# EAGLE board Teensylu-1.2-4L (EAGLE 7.1.0)
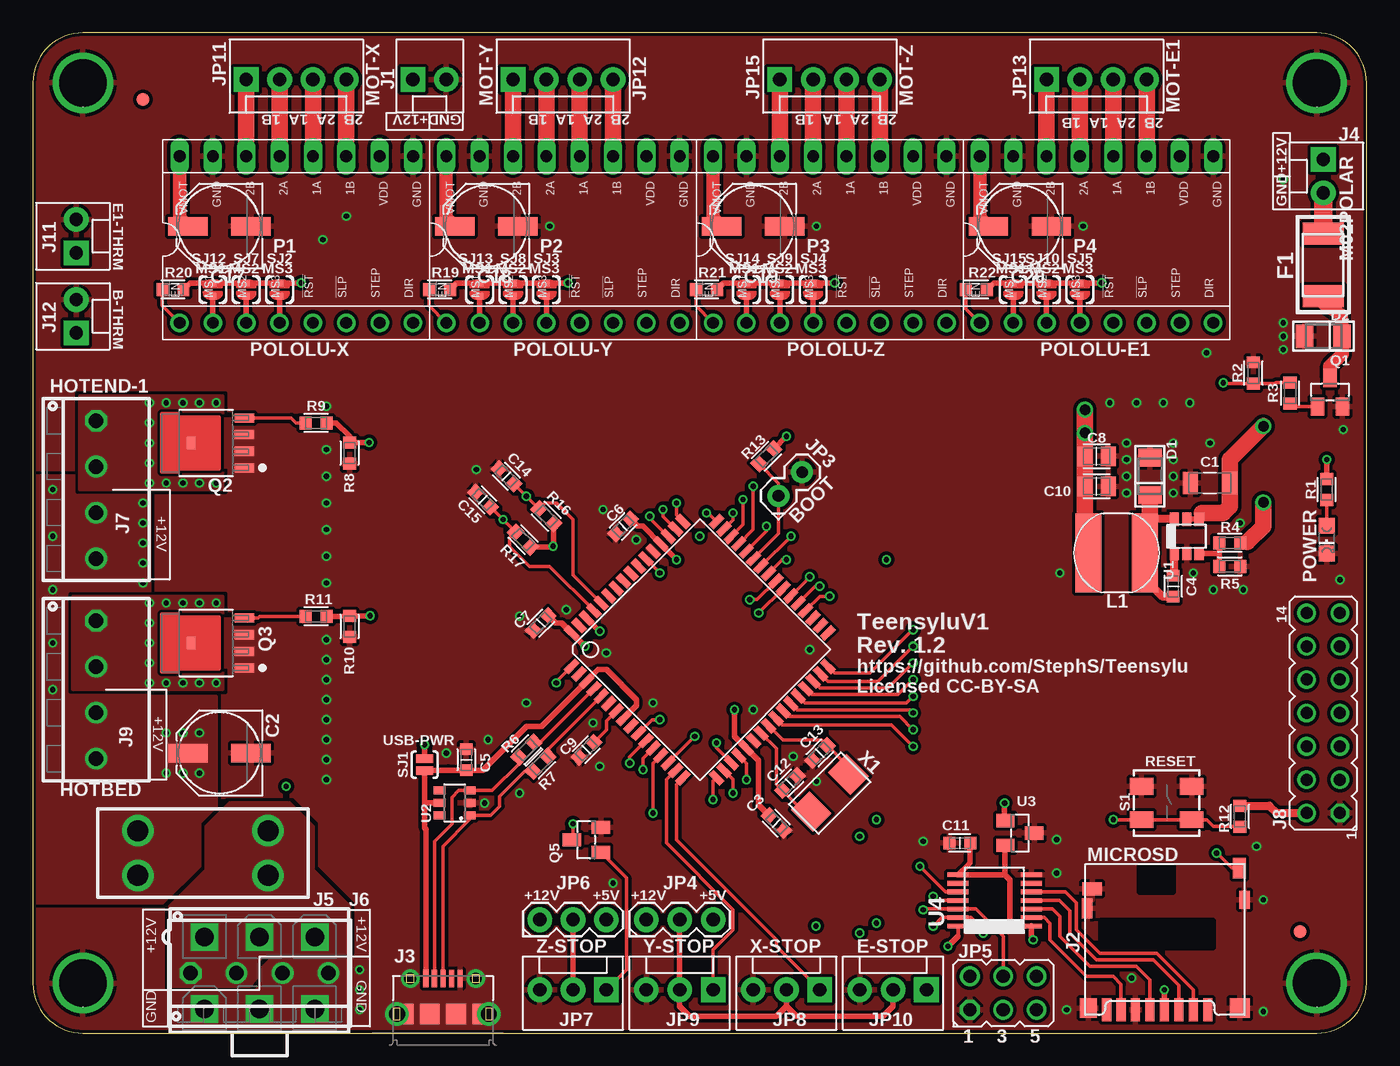
[diagram p0: board, top side]
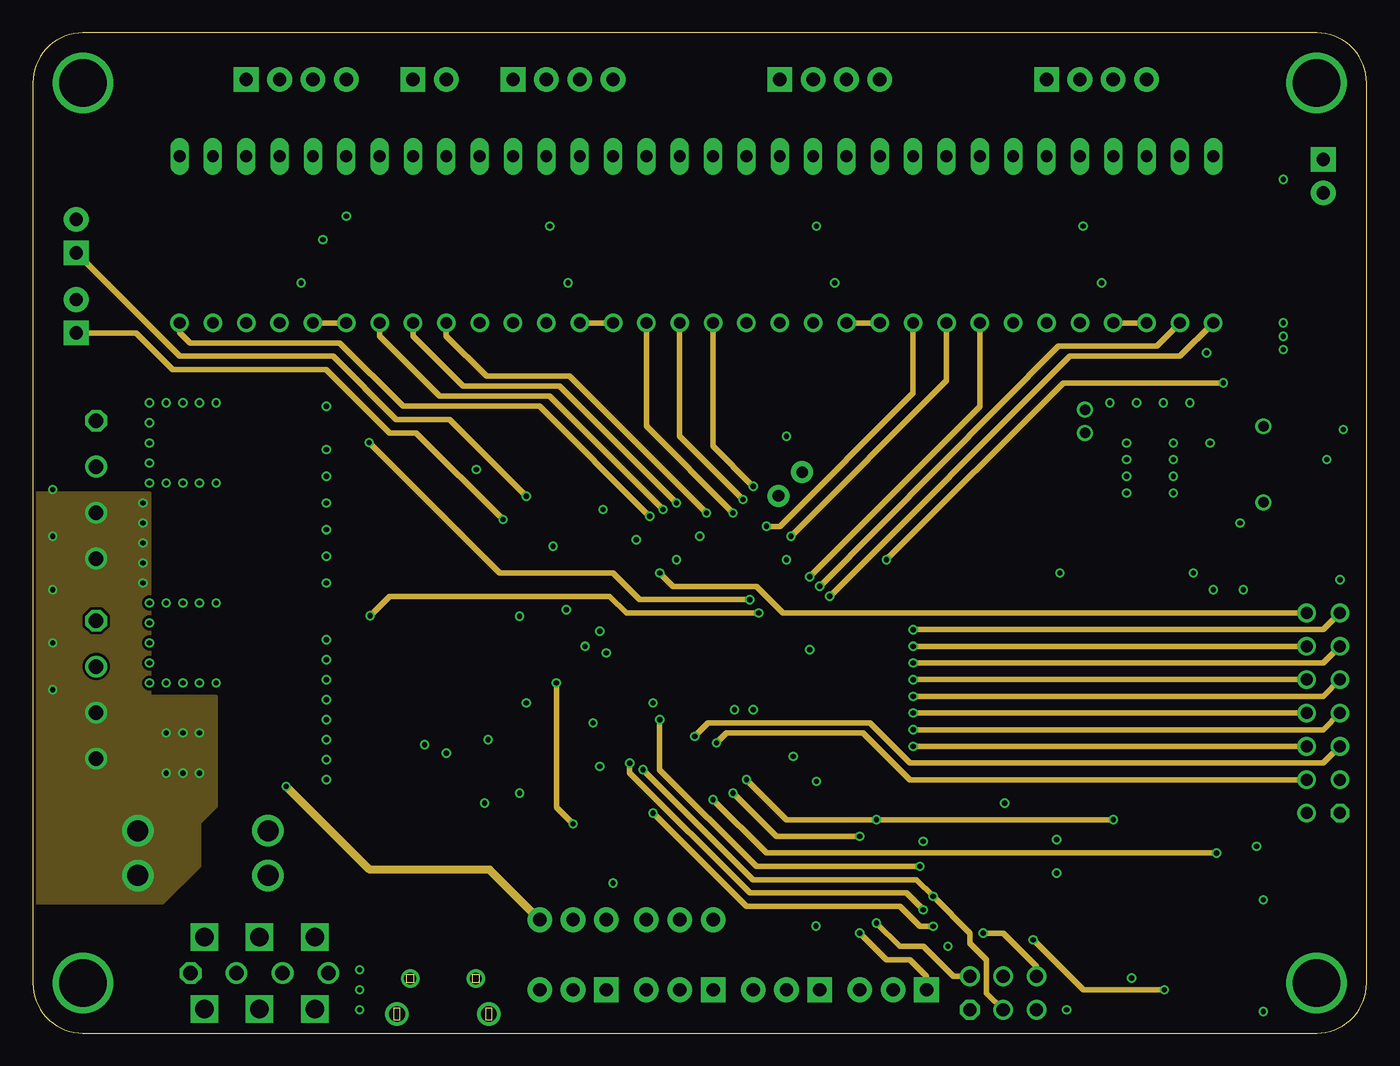
[diagram p1: board, inner layer Route2]
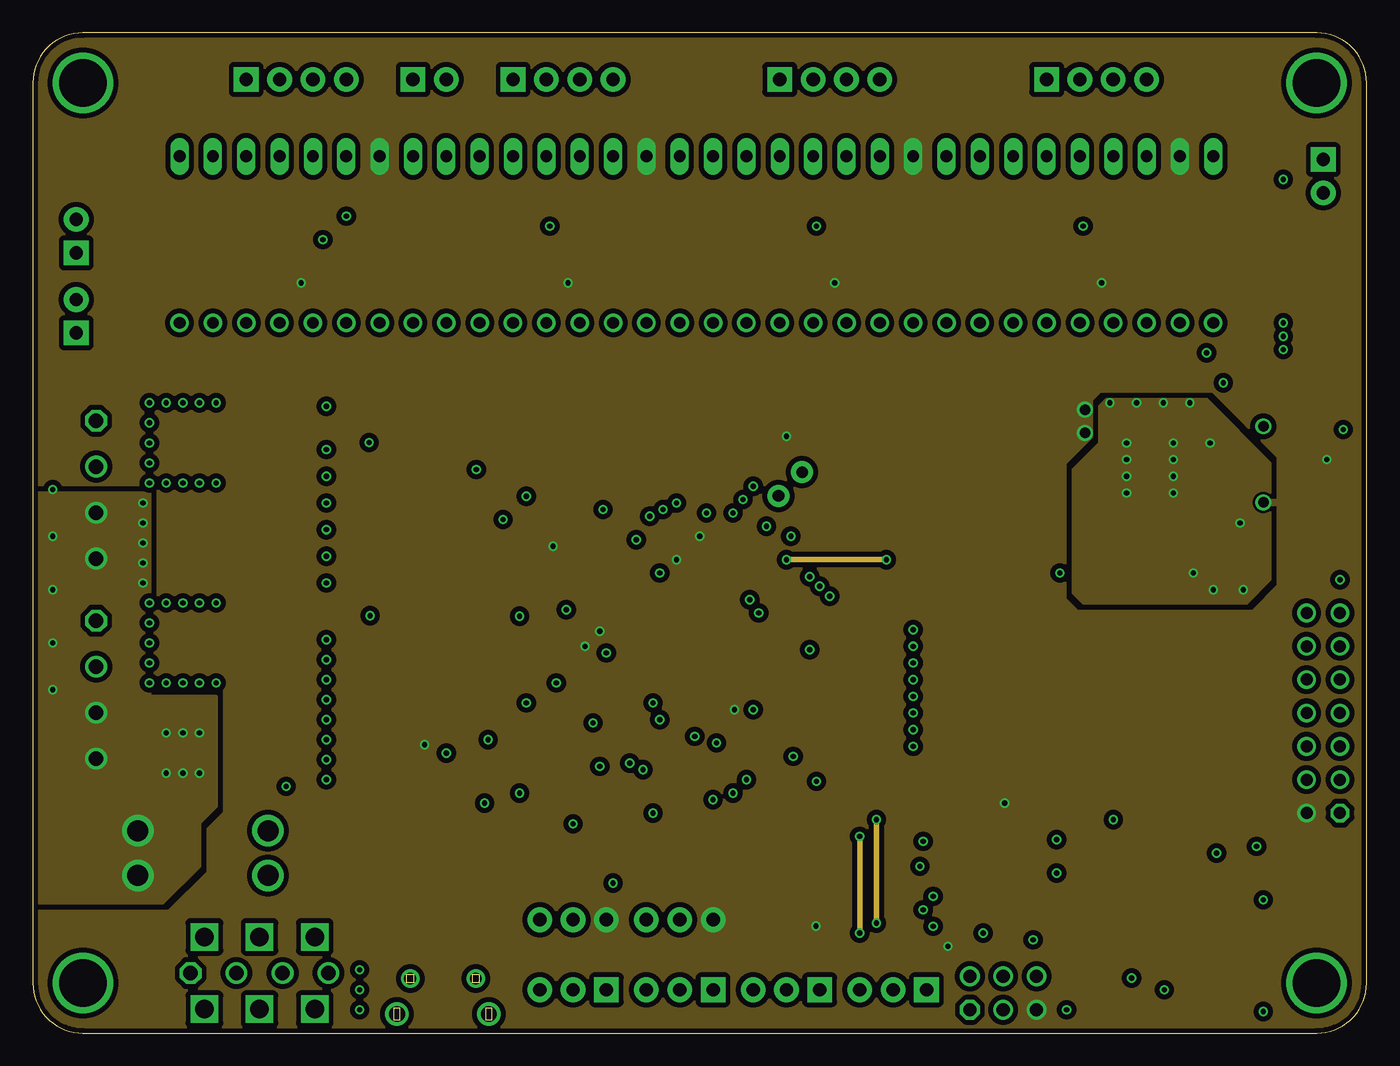
[diagram p2: board, inner layer Route15]
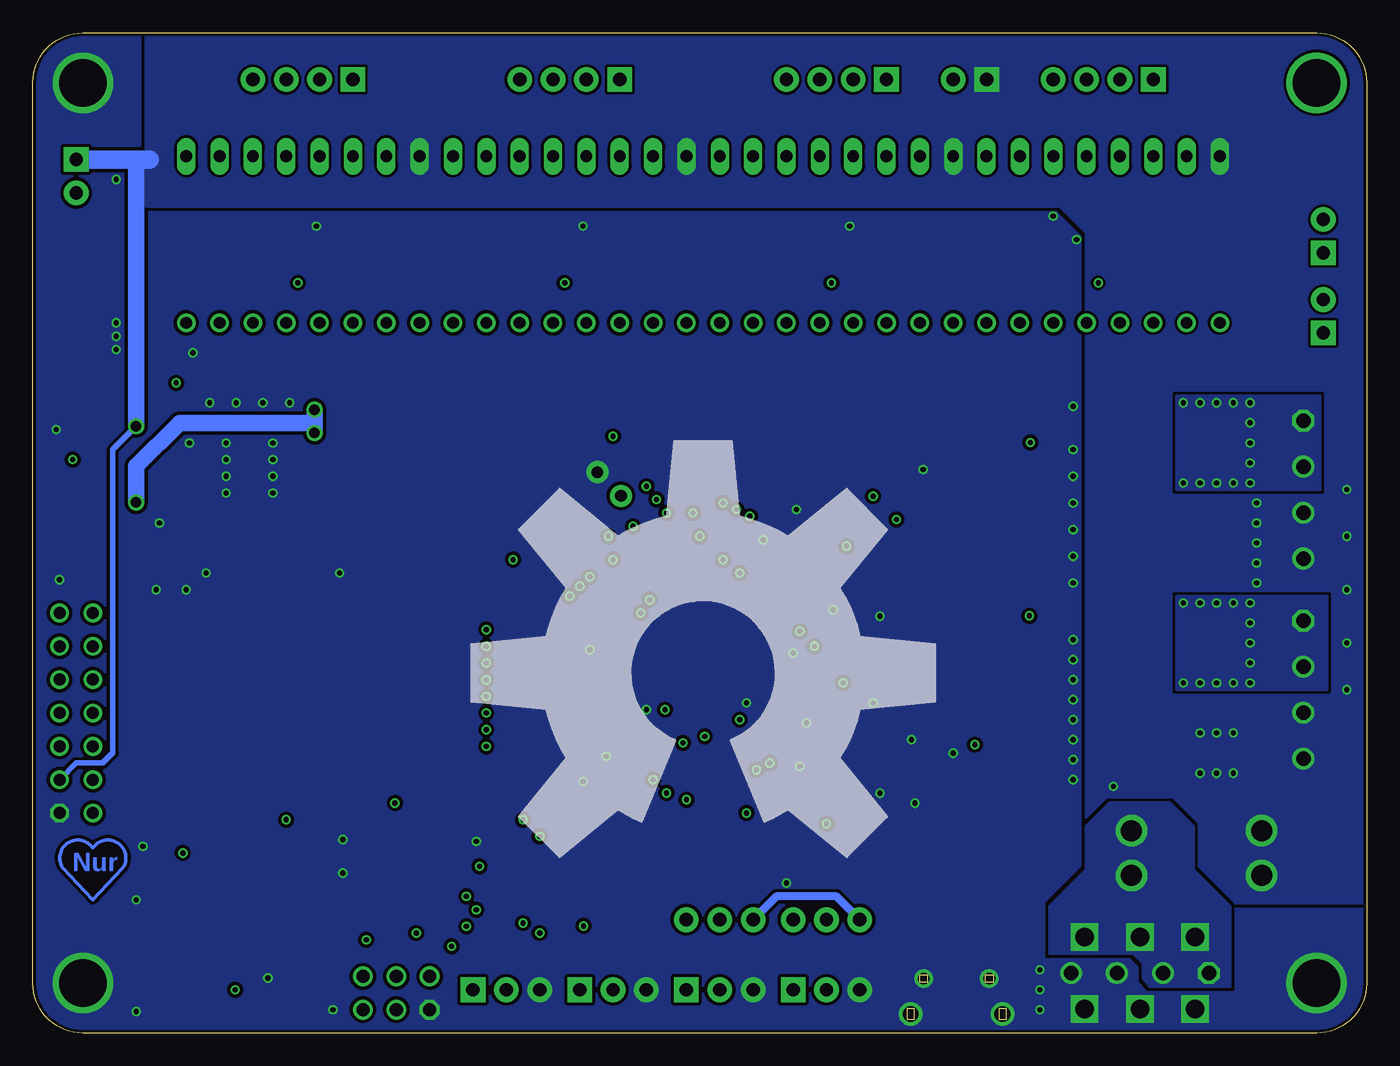
[diagram p3: board, bottom side, seen from below]

Size 101.6 x 76.2 mm. Coordinates in mm from the lower left corner, seen from the top.
Outline: 0,3.81 arc90 3.81,0 97.79,0 arc90 101.6,3.81 101.6,72.39 arc90 97.79,76.2 3.81,76.2 arc90 0,72.39 0,3.81
Copper layers (1*2+15*16): Top 0.035mm / dielectric 1.5mm / Route2 0.035mm / dielectric 0.15mm / Route15 0.035mm / dielectric 0.2mm / Bottom 0.035mm
Design rules "Teensylu Custom": minimum track width 8mil, minimum drill 15mil, track to track 8mil, track to pad 8mil, pad to pad 8mil, via to via 8mil, smd to smd 0mil, copper to edge 10mil, drill to drill 10mil, minimum pad ring 10mil, minimum via ring 6mil, stop-mask expansion 2mil, vias tented up to drill 100mil, thermal gap 10mil

## Footprints (pad centres in the part's own frame; a part is rotated, then mirrored left to right if it is on the bottom)
CAPC3215X168N = smd 1.15 x 1.65: 1 -1.5,0; 2 1.5,0
PANASONIC_D = smd 3 x 1.4: + 2.4,0; - -2.4,0
CAPC1608X92N = smd 0.9 x 0.95: 1 -0.8,0; 2 0.8,0
CAPC2012X145AN = smd 1.15 x 1.45: 1 -0.9,0; 2 0.9,0
SOD123F = smd 1.34 x 1.8: A 1.43,0; C -1.43,0
MINISMDC = smd 1.676 x 3.15: P$1 -2.286,0; P$2 2.489,0
MINI_FUSE = drill 1.6: P$1 -4.953,1.702; P$2 -4.953,-1.702; P$3 4.953,-1.702; P$4 4.953,1.702
MOLEX-1X2 = drill 1.016 pad 1.88 square: 1 0,0 | drill 1.016 pad 1.88: 2 2.54,0
AMPHENOL-MICROSD = smd 0.7 x 1.75: 1 3.636,-5.842; 2 2.536,-5.842; 3 1.436,-5.842; 4 0.336,-5.842; 5 -0.764,-5.842; 6 -1.864,-5.842; 7 -2.964,-5.842; 8 -4.064,-5.842 | smd 1.29 x 1.5: C1 -5.464,-5.717 | smd 1.5 x 1.5: C2 6.086,-5.717 | smd 0.8 x 1.5: C3 -5.539,1.883 | smd 0.8 x 1.4: C4 6.436,2.533 | smd 1.5 x 1: CD1 -5.164,3.383 | smd 1 x 1.55: CD2 6.036,4.958
USB-MICROB-PTH = smd 0.4 x 1.35: D+ 0,2.699; D- -0.65,2.699; GND 1.3,2.699; ID 0.65,2.699; VBUS -1.3,2.699 | drill 1.2 pad 1.676: GND1 -3.5,-0.001; GND6 3.5,-0.001 | smd 1.225 x 1.55: GND2 -2.86,-0.001 | smd 1.5 x 1.55: GND3 -1,-0.001; GND4 1,-0.001 | smd 1.2 x 1.55: GND5 2.86,-0.001 | drill 0.9 pad 1.27: GND7 2.5,2.7; GND8 -2.5,2.7
284391-4 = drill 1.1 octagon: 1 -5.25,0 | drill 1.1: 2 -1.753,0; 3 1.753,0; 4 5.25,0
39-29-3066 = drill 1.4 square: 1 4.2,-2.75; 2 0,-2.75; 3 -4.2,-2.75; 4 4.2,2.75; 5 0,2.75; 6 -4.2,2.75
JP7Q = drill 0.914 octagon: 1 -7.62,-1.27 | drill 0.914: 2 -7.62,1.27; 3 -5.08,-1.27; 4 -5.08,1.27; 5 -2.54,-1.27; 6 -2.54,1.27; 7 0,-1.27; 8 0,1.27; 9 2.54,-1.27; 10 2.54,1.27; 11 5.08,-1.27; 12 5.08,1.27; 13 7.62,-1.27; 14 7.62,1.27
FIDUCIAL-1X2.5 = smd 1 x 1: 1 0,0
1X02 = drill 0.9 pad 1.676: 1 0,0; 2 2.54,0
1X03 = drill 1.016 pad 1.88: 1 0,0; 2 2.54,0; 3 5.08,0
ISP = drill 1 octagon: 1 -2.54,-1.27 | drill 1: 2 -2.54,1.27; 3 0,-1.27; 4 0,1.27; 5 2.54,-1.27; 6 2.54,1.27
MOLEX-1X3 = drill 1.016 pad 1.88 square: 1 0,0 | drill 1.016 pad 1.88: 2 2.54,0; 3 5.08,0
MOLEX-1X4 = drill 1.016 pad 1.88 square: 1 0,0 | drill 1.016 pad 1.88: 2 2.54,0; 3 5.08,0; 4 7.62,0
SRN6045 = smd 2 x 6: 1 -2.15,0; 2 2.15,0
CHIPLED_0805 = smd 1.2 x 1.2: A 0,-1.05; C 0,1.05
POLOLU-STEPPER-PTH = drill 0.9 long: 1A 6.35,-1.27; 1B 6.35,-3.81; 2A 6.35,1.27; 2B 6.35,3.81; GNDMOT 6.35,6.35; GNDVDD 6.35,-8.89; VDD 6.35,-6.35; VMOT 6.35,8.89 | drill 0.9: !EN -6.35,8.89; !RST -6.35,-1.27; !SLP -6.35,-3.81; DIR -6.35,-8.89; MS1 -6.35,6.35; MS2 -6.35,3.81; MS3 -6.35,1.27; STEP -6.35,-6.35
SOT23C = smd 1 x 1.4: 1 -0.95,-1.1; 2 0.95,-1.1; 3 0,1.1
LFPACK-POWERPAK-SO8 = smd 0.7 x 1.5: 1 -1.905,-2.9; 2 -0.635,-2.9; 3 0.635,-2.9; 4 1.905,-2.9 | smd 0.9 x 0.6: 5-8 0,1.15
RESC1608X55N = smd 0.9 x 1: 1 -0.8,0; 2 0.8,0
TACTILE_SWITCH_SMD = smd 1.78 x 1.27: 1 -1.905,1.27; 2 1.905,1.27; 3 -1.905,-1.27; 4 1.905,-1.27
PLATEDSCREW = drill 3.6: GND 0,0
SJ_2S-NO = smd 0.635 x 1.27: 1 -0.45,0; 2 0.45,0
SJ_2S-TRACE = smd 0.508 x 0.508: 1 -0.508,0; 2 0.508,0
TSOT6 = smd 0.69 x 1: 1 -0.95,-1.3; 2 0,-1.3; 3 0.95,-1.3; 4 0.95,1.3; 5 0,1.3; 6 -0.95,1.3
SOT23-6 = smd 0.6 x 0.9: 1 -0.95,-1.15; 2 0,-1.15; 3 0.95,-1.15; 4 0.95,1.15; 5 0,1.15; 6 -0.95,1.15
TSSOP14 = smd 0.35 x 1.6: 1 -2,-2.9; 2 -1.35,-2.9; 3 -0.7,-2.9; 4 -0.05,-2.9; 5 0.6,-2.9; 6 1.25,-2.9; 7 1.9,-2.9; 8 1.9,2.7; 9 1.25,2.7; 10 0.6,2.7; 11 -0.05,2.7; 12 -0.7,2.7; 13 -1.35,2.7; 14 -2,2.7
TQFP64-2 = smd 1.194 x 0.508: 1 -7.8,6; 2 -7.8,5.2; 3 -7.8,4.4; 4 -7.8,3.6; 5 -7.8,2.8; 6 -7.8,2; 7 -7.8,1.2; 8 -7.8,0.4; 9 -7.8,-0.4; 10 -7.8,-1.2; 11 -7.8,-2; 12 -7.8,-2.8; 13 -7.8,-3.6; 14 -7.8,-4.4; 15 -7.8,-5.2; 16 -7.8,-6; 33 7.8,-6; 34 7.8,-5.2; 35 7.8,-4.4; 36 7.8,-3.6; 37 7.8,-2.8; 38 7.8,-2; 39 7.8,-1.2; 40 7.8,-0.4; 41 7.8,0.4; 42 7.8,1.2; 43 7.8,2; 44 7.8,2.8; 45 7.8,3.6; 46 7.8,4.4; 47 7.8,5.2; 48 7.8,6 | smd 0.508 x 1.194: 17 -6,-7.8; 18 -5.2,-7.8; 19 -4.4,-7.8; 20 -3.6,-7.8; 21 -2.8,-7.8; 22 -2,-7.8; 23 -1.2,-7.8; 24 -0.4,-7.8; 25 0.4,-7.8; 26 1.2,-7.8; 27 2,-7.8; 28 2.8,-7.8; 29 3.6,-7.8; 30 4.4,-7.8; 31 5.2,-7.8; 32 6,-7.8; 49 6,7.8; 50 5.2,7.8; 51 4.4,7.8; 52 3.6,7.8; 53 2.8,7.8; 54 2,7.8; 55 1.2,7.8; 56 0.4,7.8; 57 -0.4,7.8; 58 -1.2,7.8; 59 -2,7.8; 60 -2.8,7.8; 61 -3.6,7.8; 62 -4.4,7.8; 63 -5.2,7.8; 64 -6,7.8
NDK-XTAL = smd 2 x 2.4: P$1 -2,0; P$2 2,0

## Placement (x,y rotation side)
C1  4.7uF  [CAPC3215X168N]  89.66,41.91 180 top
C2  100uF  [PANASONIC_D]  14.22,21.34 180 top
C3  0.1uF  [CAPC1608X92N]  56.64,16 315 top
C4  0.1uF  [CAPC1608X92N]  86.87,34.04 90 top
C5  0.1uF  [CAPC1608X92N]  33.02,20.83 270 top
C6  0.1uF  [CAPC1608X92N]  44.96,38.61 45 top
C7  0.1uF  [CAPC1608X92N]  38.69,31.24 45 top
C8  10uF  [CAPC2012X145AN]  81.03,43.94 0 top
C9  1uF  [CAPC1608X92N]  42.16,21.59 45 top
C10  10uF  [CAPC2012X145AN]  81.03,41.66 0 top
C11  10uF  [CAPC1608X92N]  70.61,14.48 180 top
C12  10pF  [CAPC1608X92N]  57.66,19.05 225 top
C13  10pF  [CAPC1608X92N]  59.94,21.34 45 top
C14  10uF  [CAPC1608X92N]  36.07,42.42 315 top
C15  10uF  [CAPC1608X92N]  34.29,40.64 315 top
C17  100uF  [PANASONIC_D]  14.22,61.47 180 top
C18  100uF  [PANASONIC_D]  34.54,61.47 180 top
C19  100uF  [PANASONIC_D]  54.86,61.47 180 top
C20  100uF  [PANASONIC_D]  75.18,61.47 180 top
D1  SCH-DIODESOD123F  [SOD123F]  85.09,42.42 90 top
D2  SCH-DIODESOD123F  [SOD123F]  98.3,53.09 180 top
F1  MINISMDC050F1812  [MINISMDC]  98.3,58.42 90 top
F2  MINI-FUSEMINI-FUSE  [MINI_FUSE]  12.95,13.72 180 top
J1  M02POLAR  [MOLEX-1X2]  28.96,72.64 0 top
J2  MICROSD  [AMPHENOL-MICROSD]  85.85,7.62 0 top
J3  USB-MICRO-PTH  [USB-MICROB-PTH]  31.24,1.46 0 top
J4  M02POLAR  [MOLEX-1X2]  98.3,66.55 270 top
J5  4P-TERM-BLOCK284391-4  [284391-4]  17.27,4.57 0 top
J6  39-29-3066  [39-29-3066]  17.27,4.57 180 top
J7  HOTEND-1  [284391-4]  4.83,41.4 270 top
J8  2x7  [JP7Q]  98.3,24.38 90 top
J9  HOTBED  [284391-4]  4.83,26.16 270 top
J11  M02POLAR  [MOLEX-1X2]  3.3,59.44 90 top
J12  M02POLAR  [MOLEX-1X2]  3.3,53.34 90 top
JP1  FIDUCIAL1X2.5  [FIDUCIAL-1X2.5]  8.38,71.12 0 top
JP2  FIDUCIAL1X2.5  [FIDUCIAL-1X2.5]  96.52,7.75 0 top
JP3  BOOT  [1X02]  56.81,40.93 45 top
JP4  JUMPER-3PTH  [1X03]  46.74,8.64 0 top
JP5  ISP  [ISP]  73.91,3.05 0 top
JP6  JUMPER-3PTH  [1X03]  38.61,8.64 0 top
JP7  M03POLAR  [MOLEX-1X3]  43.69,3.3 180 top
JP8  M03POLAR  [MOLEX-1X3]  59.94,3.3 180 top
JP9  M03POLAR  [MOLEX-1X3]  51.82,3.3 180 top
JP10  M03POLAR  [MOLEX-1X3]  68.07,3.3 180 top
JP11  MOT-X  [MOLEX-1X4]  16.26,72.64 0 top
JP12  MOT-Y  [MOLEX-1X4]  36.58,72.64 0 top
JP13  MOT-E1  [MOLEX-1X4]  77.22,72.64 0 top
JP15  MOT-Z  [MOLEX-1X4]  56.9,72.64 0 top
L1  68uH  [SRN6045]  82.55,36.58 180 top
LED1  POWER  [CHIPLED_0805]  98.55,37.59 180 top
P1  POLOLU-X  [POLOLU-STEPPER-PTH]  20.07,60.45 90 top
P2  POLOLU-Y  [POLOLU-STEPPER-PTH]  40.39,60.45 90 top
P3  POLOLU-Z  [POLOLU-STEPPER-PTH]  60.71,60.45 90 top
P4  POLOLU-E1  [POLOLU-STEPPER-PTH]  81.03,60.45 90 top
Q1  PMV45EN  [SOT23C]  98.81,48.83 0 top
Q2  PSMN1R2-30YLC  [LFPACK-POWERPAK-SO8]  13.21,44.96 90 top
Q3  PSMN1R2-30YLC  [LFPACK-POWERPAK-SO8]  13.21,29.72 90 top
Q5  MMUN2211LT3G  [SOT23C]  42.16,14.73 90 top
R1  1K  [RESC1608X55N]  98.55,41.4 90 top
R2  10k  [RESC1608X55N]  92.96,50.29 90 top
R3  100  [RESC1608X55N]  95.76,48.77 270 top
R4  36k  [RESC1608X55N]  91.19,37.34 180 top
R5  6.49k  [RESC1608X55N]  91.19,35.56 0 top
R6  22  [RESC1608X55N]  37.59,21.59 45 top
R7  22  [RESC1608X55N]  38.67,20.51 45 top
R8  10k  [RESC1608X55N]  24.13,44.2 270 top
R9  100  [RESC1608X55N]  21.59,46.48 180 top
R10  10k  [RESC1608X55N]  24.13,30.99 270 top
R11  100  [RESC1608X55N]  21.59,31.75 180 top
R12  100k  [RESC1608X55N]  91.95,16.51 90 top
R13  100k  [RESC1608X55N]  55.88,43.94 45 top
R16  4.7k  [RESC1608X55N]  39.12,39.37 315 top
R17  4.7k  [RESC1608X55N]  37.34,37.59 315 top
R19  100k  [RESC1608X55N]  30.99,56.64 180 top
R20  100k  [RESC1608X55N]  10.67,56.64 180 top
R21  100k  [RESC1608X55N]  51.31,56.64 180 top
R22  100k  [RESC1608X55N]  71.88,56.64 180 top
S1  RESET  [TACTILE_SWITCH_SMD]  86.36,17.53 0 top
SCREW1  3MM-SCREW  [PLATEDSCREW]  3.81,72.39 0 top
SCREW2  3MM-SCREW  [PLATEDSCREW]  3.81,3.81 0 top
SCREW3  3MM-SCREW  [PLATEDSCREW]  97.79,72.39 0 top
SCREW4  3MM-SCREW  [PLATEDSCREW]  97.79,3.81 0 top
SJ1  USB-PWR  [SJ_2S-NO]  29.84,20.45 90 top
SJ2  MS3  [SJ_2S-TRACE]  18.8,56.64 90 top
SJ3  MS3  [SJ_2S-TRACE]  39.12,56.64 90 top
SJ4  MS3  [SJ_2S-TRACE]  59.44,56.64 90 top
SJ5  MS3  [SJ_2S-TRACE]  79.76,56.64 90 top
SJ7  MS2  [SJ_2S-TRACE]  16.26,56.64 90 top
SJ8  MS2  [SJ_2S-TRACE]  36.58,56.64 90 top
SJ9  MS2  [SJ_2S-TRACE]  56.9,56.64 90 top
SJ10  MS2  [SJ_2S-TRACE]  77.22,56.64 90 top
SJ12  MS1  [SJ_2S-TRACE]  13.72,56.64 90 top
SJ13  MS1  [SJ_2S-TRACE]  34.04,56.64 90 top
SJ14  MS1  [SJ_2S-TRACE]  54.36,56.64 90 top
SJ15  MS1  [SJ_2S-TRACE]  74.68,56.64 90 top
U1  LMR16006X  [TSOT6]  87.88,37.85 0 top
U2  PRTR5V0U4DSOT23-6  [SOT23-6]  32.13,17.53 90 top
U3  AP7313SOT23C  [SOT23C]  75.18,15.24 270 top
U4  TXB0104TSSOP14  [TSSOP14]  73.15,10.16 90 top
U5  AT90USB1286  [TQFP64-2]  50.8,29.21 45 top
X1  16MHZ  [NDK-XTAL]  60.71,18.29 45 top

## Library data of the parts
C1 = teensylu; MANUFACTURER: Yaiyo Yuden; MANUFACTURER_PART_NUMBER: UMK316AB7475KL-T; TOLERANCE: 10%; VDC: 50v
C2 C17-C20 = teensylu; MANUFACTURER: Panasonic; MANUFACTURER_PART_NUMBER: EEE-FTH101XAP; TOLERANCE: 20%; VDC: 50v
C3 C5-C7 = teensylu; MANUFACTURER: Murata; MANUFACTURER_PART_NUMBER: GRM188R71C104KA01D; TOLERANCE: 10%; VDC: 16V
C4 = teensylu; MANUFACTURER: Samsung; MANUFACTURER_PART_NUMBER: CL10B104KB8NNNC; TOLERANCE: 10%; VDC: 50V
C8 C10 = teensylu; ESR: 0.0030; MANUFACTURER: Murata; MANUFACTURER_PART_NUMBER: GRM21BR71A106KE51L; TOLERANCE: 10%; VDC: 10v
C9 = teensylu; MANUFACTURER: Samsung; MANUFACTURER_PART_NUMBER: CL10A105MO8NNNC; TOLERANCE: 20%; VDC: 16V
C11 C14 C15 = teensylu; MANUFACTURER: Murata; MANUFACTURER_PART_NUMBER: GRM188R61C106MA73D; TOLERANCE: 20%; VDC: 16V
C12 C13 = teensylu; MANUFACTURER: Samsung; MANUFACTURER_PART_NUMBER: CL10C100JB8NCNC; TOLERANCE: 5%; VDC: 50V
D1 D2 = teensylu; CURRENT: 1A; MANUFACTURER: NXP Semiconductors; MANUFACTURER_PART_NUMBER: PMEG4010CEH,115; REVERSE_VOLTAGE: 40V
F1 = teensylu; CURRENT: 0.5A; MANUFACTURER: TE Connectivity; MANUFACTURER_PART_NUMBER: MINISMDC050F-2
F2 = teensylu; CURRENT: 15A; MANUFACTURER: Keystone; MANUFACTURER_PART_NUMBER: 3568
J1 J4 J11 J12 = teensylu; DESCRIPTION: CONN HEADER 2POS .100 VERT TIN; MANUFACTURER: Molex; MANUFACTURER_PART_NUMBER: 0022272021; NOTES: Can use alternative part for Right Angle. MFG: TE Connectivity PN: 640455-2
J2 = teensylu; DESCRIPTION: CONN MICRO SD CARD PUSH-PULL R/A; MANUFACTURER: Amphenol; MANUFACTURER_PART_NUMBER: 114-00841-68
J3 = teensylu; MANUFACTURER: FCI; MANUFACTURER_PART_NUMBER: 10118194-0001LF
J5 J7 J9 = teensylu; CURRENT: 12A; MANUFACTURER: TE Connectivity; MANUFACTURER_PART_NUMBER: 284391-4
J6 = teensylu; MANUFACTURER: Molex; MANUFACTURER_PART_NUMBER: 0039293066
J8 = teensylu; DESCRIPTION: DIL VERTICAL PC TAIL PIN HEADER; MANUFACTURER: Harwin; MANUFACTURER_PART_NUMBER: M20-9980746
JP1 JP2 = SparkFun
JP3 = teensylu; DESCRIPTION: SIL VERTICAL PC TAIL PIN HEADER; MANUFACTURER: Harwin; MANUFACTURER_PART_NUMBER: M20-9990246
JP4-JP6 P1-P4 R1-R3 R6-R13 R16 R17 R19-R22 SCREW1-SCREW4 SJ1-SJ5 SJ7-SJ10 SJ12-SJ15 = teensylu
JP7-JP10 = teensylu; DESCRIPTION: CONN HEADER 3POS .100 VERT TIN; MANUFACTURER: Molex; MANUFACTURER_PART_NUMBER: 0022272031; NOTES: Can use alternative part for Right Angle. MFG: TE Connectivity PN: 640455-3
JP11-JP13 JP15 = teensylu; DESCRIPTION: CONN HEADER 4POS .100 VERT TIN; MANUFACTURER: Molex; MANUFACTURER_PART_NUMBER: 0022272041; NOTES: Can use alternative part for Right Angle. MFG: TE Connectivity PN: 640455-4
L1 = teensylu; CURRENT: 900mA; DCR: 0.351; INDUCTANCE: 68uH; IRMS: 0.9A; MANUFACTURER: Bourns; MANUFACTURER_PART_NUMBER: SRN6045-680M
LED1 = teensylu; MANUFACTURER: Kingbright; MANUFACTURER_PART_NUMBER: APT2012SGC
Q1 = teensylu; CURRENT: 1.2A; MANUFACTURER: International Rectifier; MANUFACTURER_PART_NUMBER: IRLML2060TRPBF; VOLTAGE: 60V
Q2 Q3 = teensylu; CURRENT: 100A; MANUFACTURER: NXP Semiconductors; MANUFACTURER_PART_NUMBER: PSMN1R2-30YLC,115; RDS_ON: 1.25mOhm; VGS: 1.95V; VOLTAGE: 30V
Q5 = teensylu; DESCRIPTION: TRANS PREBIAS NPN 246MW SOT23-3; MANUFACTURER: ON Semiconductor; MANUFACTURER_PART_NUMBER: MMUN2211LT3G
R4 R5 = teensylu; TOLERANCE: 1%
S1 = teensylu; MANUFACTURER: Bourns; MANUFACTURER_PART_NUMBER: 7914J-1-000E
U1 = teensylu; CURRENT: 600mA; MANUFACTURER: Texas Instruments; MANUFACTURER_PART_NUMBER: LMR16006XDDCT
U2 = teensylu; MANUFACTURER: NXP Semiconductors; MANUFACTURER_PART_NUMBER: PRTR5V0U4D,125
U3 = teensylu; CURRENT: 150mA; DESCRIPTION: IC REG LDO 3.3V 0.15A SOT23-3; MANUFACTURER: Diodes Incorporated; MANUFACTURER_PART_NUMBER: AP7313-33SAG-7; VOLTAGE_OUTPUT: 3.3V
U4 = teensylu; DESCRIPTION: IC VOLT-LEVEL TRANSLATOR 14TSSOP; MANUFACTURER: Texas Instruments; MANUFACTURER_PART_NUMBER: TXB0104PWR
U5 = teensylu; MANUFACTURER: Atmel; MANUFACTURER_PART_NUMBER: AT90USB1286
X1 = teensylu; MANUFACTURER: NDK; MANUFACTURER_PART_NUMBER: NX5032GA-16.000000MHZ-LN-CD-1

## Nets
5V [power]: C3.1 C6.2 C7.2 C8.1 C10.1 J8.2 JP4.3 JP5.5 JP6.3 L1.2 P1.VDD P2.VDD P3.VDD P4.VDD R1.2 R4.1 R12.2 R13.2 R16.2 R17.2 R19.1 R20.1 R21.1 R22.1 SJ1.2 SJ2.2 SJ3.2 SJ4.2 SJ5.2 SJ7.2 SJ8.2 SJ9.2 SJ10.2 SJ12.2 SJ13.2 SJ14.2 SJ15.2 U3.1 U4.14 U5.21 U5.52 U5.62 U5.64
5VREG_CB: C4.2 U1.1
5VREG_FB: R4.2 R5.1 U1.3
5VREG_SW: C4.1 D1.C L1.1 U1.6
12V: C1.1 C2.+ C17.+ C18.+ C19.+ C20.+ F2.P$3 F2.P$4 J1.1 J4.1 J7.3 J7.4 J8.3 J9.3 J9.4 JP4.1 JP6.1 P1.VMOT P2.VMOT P3.VMOT P4.VMOT U1.4 U1.5
12V_FUSE: F2.P$1 F2.P$2 J5.1 J5.2 J6.1 J6.2 J6.3
!E1-ENABLE: P4.!EN R22.2 U5.38
!E2-ENABLE: U5.35
!HOTBED: R10.1 R11.1 U5.39
!HOTEND-1: R8.1 R9.1 U5.40
!HOTEND-2: U5.58
!PWM-FAN: R2.1 R3.1 U5.41
!RESET: JP5.2 R12.1 S1.3 S1.4 U5.20
!X-ENABLE: P1.!EN R20.2 U5.51
!Y-ENABLE: P2.!EN R19.2 U5.48
!Z-ENABLE: P3.!EN R21.2 U5.45
+3V3 [power]: C11.1 J2.4 U3.2 U4.1 U4.8
A4: U5.57
A5: U5.56
A6: U5.55
A7: J8.14 U5.54
ALE: JP3.1 R13.1 U5.43
B-THERM: C15.2 J12.1 R17.1 U5.61
E1-DIR: P4.DIR U5.36
E1-STEP: P4.STEP U5.37
E1-THERM: C14.2 J11.1 R16.1 U5.60
E2-DIR: U5.34
E2-STEP: U5.33
E2-THERM: U5.59
E-MOT-1A [power]: JP13.3 P4.1A
E-MOT-1B [power]: JP13.4 P4.1B
E-MOT-2A [power]: JP13.2 P4.2A
E-MOT-2B [power]: JP13.1 P4.2B
E-MS1: P4.MS1 SJ15.1
E-MS2: P4.MS2 SJ10.1
E-MS3: P4.MS3 SJ5.1
E-RESETSLEEP: P4.!RST P4.!SLP
E-STOP: JP10.1 U5.18
ENDSTOP+V: JP4.2 JP8.2 JP9.2 JP10.2
GND [power]: C1.2 C2.- C3.2 C5.1 C6.1 C7.1 C8.2 C9.1 C10.2 C11.2 C12.1 C13.1 C14.1 C15.1 C17.- C18.- C19.- C20.- D1.A D2.A J1.2 J2.6 J2.C1 J2.C2 J2.C3 J2.C4 J2.CD1 J3.GND J3.GND1 J3.GND2 J3.GND3 J3.GND4 J3.GND5 J3.GND6 J3.GND7 J3.GND8 J5.3 J5.4 J6.4 J6.5 J6.6 J8.1 J11.2 J12.2 JP3.2 JP5.1 JP7.3 JP8.3 JP9.3 JP10.3 LED1.C P1.GNDMOT P1.GNDVDD P2.GNDMOT P2.GNDVDD P3.GNDMOT P3.GNDVDD P4.GNDMOT P4.GNDVDD Q1.2 Q2.1 Q2.2 Q2.3 Q3.1 Q3.2 Q3.3 Q5.2 R2.2 R5.2 R8.2 R10.2 S1.1 S1.2 SCREW1.GND SCREW2.GND SCREW3.GND SCREW4.GND U1.2 U2.2 U3.3 U4.7 U5.6 U5.22 U5.53 U5.63
HOTBED-GND [power]: J9.1 J9.2 Q3.5-8
HOTEND-GND [power]: J7.1 J7.2 Q2.5-8
MISO: JP5.6 U4.13 U5.13
MOSI: JP5.3 U4.11 U5.12
N$1: LED1.A R1.1
N$2: Q3.4 R11.2
N$3: R6.2 U5.4
N$4: R7.2 U5.5
N$5: F1.P$2 J4.2
N$6: D2.C F1.P$1 Q1.3
N$10: Q1.1 R3.2
N$11: Q2.4 R9.2
PB4: J8.5 U5.14
PD0-SCL: J8.6 U5.25
PD1-SDA: J8.7 U5.26
PD2-RX1: J8.8 U5.27
PD3-TX1: J8.9 U5.28
PD4: J8.10 U5.29
PD5: J8.11 U5.30
PD6: J8.12 U5.31
PD7: J8.13 U5.32
PE3: U5.9
PE5: J8.4 U5.19
PE7: U5.2
SCLK: JP5.4 U4.12 U5.11
SDCD: J2.CD2 U5.17
SDCLK: J2.5 U4.3
SDCS: U4.10 U5.10
SDCSH: J2.2 U4.5
SDDI: J2.3 U4.4
SDDO: J2.7 U4.2
UCAP: C9.2 U5.7
USB_DN: J3.D- R6.1 U2.3
USB_DP: J3.D+ R7.1 U2.1
VBUS: C5.2 J3.VBUS SJ1.1 U2.5 U5.3 U5.8
X-DIR: P1.DIR U5.49
X-MOT-1A [power]: JP11.3 P1.1A
X-MOT-1B [power]: JP11.4 P1.1B
X-MOT-2A [power]: JP11.2 P1.2A
X-MOT-2B [power]: JP11.1 P1.2B
X-MS1: P1.MS1 SJ12.1
X-MS2: P1.MS2 SJ7.1
X-MS3: P1.MS3 SJ2.1
X-RESETSLEEP: P1.!RST P1.!SLP
X-STEP: P1.STEP U5.50
X-STOP: JP8.1 U5.16
XTAL1: C13.2 U5.24 X1.P$2
XTAL2: C12.2 U5.23 X1.P$1
Y-DIR: P2.DIR U5.46
Y-MOT-1A [power]: JP12.3 P2.1A
Y-MOT-1B [power]: JP12.4 P2.1B
Y-MOT-2A [power]: JP12.2 P2.2A
Y-MOT-2B [power]: JP12.1 P2.2B
Y-MS1: P2.MS1 SJ13.1
Y-MS2: P2.MS2 SJ8.1
Y-MS3: P2.MS3 SJ3.1
Y-RESETSLEEP: P2.!RST P2.!SLP
Y-STEP: P2.STEP U5.47
Y-STOP: JP9.1 U5.15
Z-DIR: P3.DIR U5.42
Z-MOT-1A [power]: JP15.3 P3.1A
Z-MOT-1B [power]: JP15.4 P3.1B
Z-MOT-2A [power]: JP15.2 P3.2A
Z-MOT-2B [power]: JP15.1 P3.2B
Z-MS1: P3.MS1 SJ14.1
Z-MS2: P3.MS2 SJ9.1
Z-MS3: P3.MS3 SJ4.1
Z-RESETSLEEP: P3.!RST P3.!SLP
Z-STEP: P3.STEP U5.44
Z-STOP: Q5.3 U5.1
Z-STOP-BIAS: JP7.1 Q5.1
Z-STOP-SUPPLY: JP6.2 JP7.2

## Tracks (layer width: path | path; a pad name or v marks a point on that pad's centre or on a via)
5V  (via drill 0.4, 0.4 pad 0.25, 0.8)
  Top 0.305: U4.14 70.45,7.38
  Top 0.406: R22.1 73.19,57.15 SJ15.2 SJ10.2 SJ5.2 v81.41,57.15 | v42.06,29.46 U5.64 40.28,31.24 39.81,31.24 C7.2 | SJ1.2 v29.84,21.97 | R13.2 v57.4,45.47 | U5.62 v43.18,30.61 | v49.02,36.06 49.03,36.07 U5.52 46.48,38.62 46.08,38.62 C6.2 | C3.1 55.26,17.38 55.26,20.79 U5.21 53.44,22.61 v53.44,24.64 | R20.1 11.98,57.15 SJ12.2 SJ7.2 SJ2.2 v20.45,57.15 | R19.1 32.3,57.15 SJ13.2 SJ8.2 SJ3.2 v40.77,57.15 | R21.1 52.62,57.15 SJ14.2 SJ9.2 SJ4.2 v61.09,57.15 | R16.2 39.68,37.14 v39.62,37.08 39.57,37.03 R17.2 | U3.1 74.02,16.19 v74.02,17.53 | 70.45,7.38 v69.7,6.6 | R1.2 v98.55,43.69
  Top 0.61: R12.2 94.2,17.31 94.74,16.76 J8.2
  Top 0.889: R4.1 92.49,37.41
  Top 1.27: v80.14,47.5 80.14,45.73 C8.1 C10.1 80.15,39.12 L1.2 | 92.49,37.41 93.73,38.61 v93.73,40.42
  Bottom 1.27: v93.73,40.42 93.73,43.18 90.42,46.48 80.14,46.48 v80.14,47.5 v80.14,45.72
  other vias: 50.8,37.85 59.66,8.16
  pour Route15 (isolate 0.381, rank 6, no thermals): -4.83,76.71 105.16,76.71 105.16,-1.52 -4.83,-1.52
5VREG_CB
  Top 0.61: C4.2 86.93,35.33 U1.1
5VREG_FB
  Top 0.406: U1.3 90.39,36.55 | 90.39,36.55 R4.2 | R5.1 90.39,36.55
5VREG_SW
  Top 0.61: U1.6 85.09,39.15 | C4.1 86.08,33.24 84.7,34.62 L1.1
  Top 0.813: 85.09,39.15 D1.C
  Top 1.27: L1.1 85.09,36.58 D1.C
12V  (via drill 0.4, 0.8)
  Top 0.406: U1.5 U1.4
  Top 0.61: 89.06,39.62 U1.4
  Top 1.016: P1.VMOT 11.18,62.12 C17.+ | P2.VMOT 31.5,62.12 C18.+ | P3.VMOT 51.82,62.12 C19.+ | P4.VMOT 72.14,62.12 C20.+
  Top 1.27: v93.73,46.23 91.19,43.69 C1.1 91.19,40.13 90.68,39.62 89.06,39.62
  Route2 0.61: v19.3,18.8 25.65,12.45 34.8,12.45 JP6.1
  Bottom 0.406: J8.3 98.3,20.57 96.27,20.57 95.5,21.34 95.5,44.45 v93.73,46.23
  Bottom 0.61: JP6.1 40.39,10.41 44.96,10.41 JP4.1
  Bottom 1.27: 93.73,66.55 v93.73,46.23
  Bottom 1.422: J4.1 93.73,66.55 92.71,66.55
  other vias: 10.16,22.86 10.16,19.81 11.43,19.81 11.43,22.86 1.52,29.72 1.52,33.78 1.52,37.85 1.52,41.4 1.52,26.16 12.7,22.86 12.7,19.81 8.38,40.39 8.38,38.86 8.38,37.34 8.38,35.81 8.38,34.29
  pour Bottom (rank 2, no thermals): 21.34,9.91 21.34,60.96 23.37,62.99 92.96,62.99 92.96,77.98 -1.27,77.98 -1.27,9.91
  pour Top (rank 2, no thermals): 9.91,9.91 0.25,9.91 0.25,42.42 8.89,42.42 8.89,25.65 13.97,25.65 13.97,17.27 12.7,16 12.7,12.7
  pour Route15 (isolate 0.381, rank 2, no thermals): 9.91,9.91 0.25,9.91 0.25,41.15 8.89,41.15 8.89,25.65 13.97,25.65 13.97,17.27 12.7,16 12.7,12.7
  pour Route2 (rank 2, no thermals): 9.91,9.91 0.25,9.91 0.25,41.15 8.89,41.15 8.89,25.65 13.97,25.65 13.97,17.27 12.7,16 12.7,12.7
12V_FUSE
  pour Top (no thermals): 13.21,12.45 13.21,15.75 14.99,17.53 19.56,17.53 21.34,15.75 21.34,12.45 24.13,9.65 24.13,6.1 17.78,6.1 17.02,5.33 17.02,4.19 16.51,3.56 10.41,3.56 10.41,9.65
  pour Bottom (no thermals): 10.41,9.65 13.21,12.45 13.21,15.73 15,17.53 19.56,17.53 21.34,15.75 21.34,12.45 24.13,9.65 24.13,6.1 17.78,6.1 17.02,5.33 17.02,4.19 16.51,3.56 10.41,3.56
!E1-ENABLE  (via drill 0.4)
  Top 0.254: U5.38 v59.18,34.76 | P4.!EN 71.08,55.16 R22.2
  Route2 0.254: v59.18,34.76 59.18,34.8
  Route2 0.406: 59.18,34.8 72.14,47.72 P4.!EN
!HOTBED  (via drill 0.4)
  Top 0.254: U5.39 v55.29,32
  Top 0.406: R11.1 23.33,31.75 R10.1 v25.69,31.79
  Route2 0.406: v55.29,32 45.21,32 43.94,33.27 27.18,33.27 v25.69,31.79
!HOTEND-1  (via drill 0.4)
  Top 0.254: R8.1 24.13,45.47 | U5.40 55.18,33.02 v54.61,33.02
  Top 0.406: v25.62,45 R8.1 | 24.13,45.47 23.11,46.48 R9.1
  Route2 0.406: v54.61,33.02 46.23,33.02 44.2,35.05 35.56,35.05 v25.62,45
!PWM-FAN  (via drill 0.4)
  Top 0.254: U5.41 57.09,36.07 v57.4,36.07 | v90.68,49.53 90.68,49.49 R2.1 94.53,49.49 94.7,49.57 R3.1
  Route2 0.406: v65.02,36.07 78.49,49.53 v90.68,49.53
  Route15 0.406: v57.4,36.07 v65.02,36.07
!RESET  (via drill 0.4)
  Top 0.254: R12.1 91.69,15.75 89.92,15.75 89.41,16.26 S1.4 S1.3 v82.3,16.26 | U5.20 54.36,20.56 v54.36,19.3
  Route2 0.406: JP5.2 70.1,4.32 67.82,6.6 66.04,6.6 v64.26,8.38 | v54.36,19.3 57.4,16.26 v64.26,16.26 v82.3,16.26
  Route15 0.406: v64.26,8.38 v64.26,16.26
!X-ENABLE  (via drill 0.4)
  Top 0.254: U5.51 46.99,39.24 v46.99,39.37 | P1.!EN 9.87,55.41 R20.2
  Route2 0.406: v46.99,39.37 38.61,47.75 28.19,47.75 23.37,52.58 11.98,52.58 11.18,53.38 P1.!EN
!Y-ENABLE  (via drill 0.4)
  Top 0.254: U5.48 51.42,39.62 v51.31,39.62 | P2.!EN 30.19,55.41 R19.2
  Route2 0.406: v51.31,39.62 40.89,50.04 34.54,50.04 31.5,53.09 P2.!EN
!Z-ENABLE  (via drill 0.4)
  Top 0.254: U5.45 54.86,38.37 v54.86,41.66 | P3.!EN 50.51,55.41 R21.2
  Route2 0.406: v54.86,41.66 51.82,44.7 P3.!EN
+3V3  (via drill 0.4)
  Top 0.254: 74.04,14.35 U3.2
  Top 0.406: 74.04,12.06 U4.8 71.21,12.79 71.37,12.95 71.37,14.59 C11.1 | 74.04,12.06 74.05,12.06 74.42,11.68 74.42,8.64 74.93,8.13 75.51,8.13 U4.1 76.05,7.26 v76.2,7.11 | v86.19,3.3 J2.4 | 74.04,12.06 74.04,13.74 U3.2
  Route2 0.406: v86.19,3.3 80.01,3.3 v76.2,7.11
A7  (via drill 0.4)
  Top 0.254: U5.54 47.75,35.09 v47.75,35.05
  Route2 0.406: J8.14 57.15,32 55.12,34.04 48.77,34.04 v47.75,35.05
ALE
  Top 0.254: U5.43 56.81,38.05 JP3.1 56.81,41.88 R13.1
B-THERM  (via drill 0.4)
  Top 0.254: v35.81,39.12 | v35.81,39.12 C15.2 | v35.81,39.12 | v35.81,39.12 R17.1 36.32,37.71 36.32,37.08 37.85,35.56 39.36,35.56 U5.61
  Route2 0.406: v35.81,39.12 29.21,45.72 27.18,45.72 22.35,50.55 10.67,50.55 7.87,53.34 J12.1
E1-DIR  (via drill 0.4)
  Top 0.254: U5.36 59.95,33.27 v60.71,33.27
  Route2 0.406: v60.71,33.27 79,51.56 87.38,51.56 P4.DIR
E1-STEP  (via drill 0.4)
  Top 0.254: U5.37 59.59,34.04 v59.94,34.04
  Route2 0.406: v59.94,34.04 78.13,52.32 85.6,52.32 P4.STEP
E1-THERM  (via drill 0.4)
  Top 0.254: U5.60 41.15,34.9 41.15,39.12 39.88,40.39 39,40.39 R16.1 v37.59,40.89 | v37.59,40.89 | v37.59,40.89 C14.2
  Route2 0.406: v37.59,40.89 31.75,46.74 27.69,46.74 22.86,51.56 11.18,51.56 J11.1
E-MOT-1A
  Top 1.27: P4.1A JP13.3
E-MOT-1B
  Top 1.27: P4.1B JP13.4
E-MOT-2A
  Top 1.27: P4.2A JP13.2
E-MOT-2B
  Top 1.27: P4.2B JP13.1
E-MS1
  Top 0.406: P4.MS1 SJ15.1
E-MS2
  Top 0.406: P4.MS2 SJ10.1
E-MS3
  Top 0.406: P4.MS3 SJ5.1
E-RESETSLEEP
  Route2 0.406: P4.!RST P4.!SLP
E-STOP  (via drill 0.4)
  Top 0.254: v53.34,18.29 53.34,19.32 U5.18
  Route2 0.406: JP10.1 68.07,4.32 66.8,5.59 65.02,5.59 v62.99,7.62 | v53.34,18.29 56.64,14.99 v62.99,14.99
  Route15 0.406: v62.99,14.99 v62.99,7.62
ENDSTOP+V
  Top 0.406: 57.4,2.03 56.64,1.27 50.04,1.27 49.28,2.03 JP9.2 JP4.2 | JP8.2 57.4,2.03 | 57.4,2.03 58.17,1.27 64.77,1.27 65.53,2.03 JP10.2
GND  (via drill 0.4, 0.4 pad 0.25)
  other vias: 34.42,17.53 24.89,4.83 24.89,3.3 24.89,1.78 43.69,28.96 67.82,14.61 77.98,12.19 57.91,21.08 47.24,25.15 59.18,29.21 45.97,37.59 89.92,33.78 93.73,10.16 93.73,1.65 93.22,14.22 86.87,42.42 86.11,48.01 78.23,35.05 84.07,48.01 88.14,48.01 92.2,33.78 99.57,34.54 43.18,20.32 42.67,23.62 22.35,29.97 22.35,34.29 89.41,51.82 22.35,28.45 22.35,26.92 22.35,25.4 22.35,23.88 22.35,38.35 22.35,36.32 22.35,47.75 78.74,1.78 43.43,39.88 54.86,24.64 83.69,4.19 31.5,21.34 77.98,14.73 59.69,19.18 34.67,22.35 37.59,25.15 22.35,22.35 88.39,35.05 89.66,44.96 86.87,41.15 86.87,43.69 83.31,43.69 83.31,42.42 83.31,41.15 95.25,54.1 95.25,52.07 82.04,48.01 33.78,42.93 37.08,31.75 40.64,32.26 37.08,18.29 44.2,11.43 22.35,40.39 22.35,42.42 95.25,53.09 95.25,65.02 22.35,44.45 83.31,44.96 86.87,44.96 91.95,38.86 99.82,45.97 22.35,20.83 22.35,19.3 22.1,60.45 23.88,62.23 39.37,61.47 59.69,61.47 80.01,61.47
  pour Top (isolate 0.254, rank 6): -6.35,78.23 106.68,78.23 106.68,-3.05 -6.35,-3.05
  pour Bottom (isolate 0.254, rank 6, no thermals): -5.08,76.96 105.41,76.96 105.41,-1.78 -5.08,-1.78
  pour Bottom (rank 2, no thermals): 24.13,5.59 18.08,5.59 17.53,5.03 17.53,3.94 16.76,3.05 10.41,3.05 10.41,0 24.13,0
  pour Route15 (rank 2): 92.46,32.77 80.01,32.77 79.25,33.53 79.25,42.93 81.28,44.96 81.28,47.75 81.79,48.26 89.41,48.26 94.23,43.43 94.23,34.54
HOTBED-GND  (via drill 0.4)
  other vias: 8.89,32.77 10.16,32.77 11.43,32.77 12.7,32.77 13.97,32.77 13.97,26.67 12.7,26.67 11.43,26.67 10.16,26.67 8.89,26.67 8.89,28.19 8.89,29.72 8.89,31.24
  pour Bottom (no thermals): 3.05,33.27 14.48,33.27 14.48,26.16 3.05,26.16
  pour Top (no thermals): 3.05,33.27 14.48,33.27 14.48,26.16 3.05,26.16
HOTEND-GND  (via drill 0.4)
  other vias: 8.89,48.01 8.89,41.91 8.89,43.43 8.89,44.96 8.89,46.48 13.97,48.01 12.7,48.01 11.43,48.01 10.16,48.01 10.16,41.91 11.43,41.91 12.7,41.91 13.97,41.91
  pour Bottom (no thermals): 3.56,48.51 14.48,48.51 14.48,41.4 3.56,41.4
  pour Top (no thermals): 3.56,48.51 14.48,48.51 14.48,41.4 3.56,41.4
MISO  (via drill 0.4)
  Top 0.254: v72.39,7.62 71.88,8.13 71.88,8.38 71.45,8.81 U4.13 69.26,8.81 v68.58,8.13 | U5.13 47.24,20.56 v47.24,16.76
  Route2 0.406: JP5.6 76.45,5.08 73.91,7.62 v72.39,7.62 | v47.24,16.76 54.36,9.65 66.04,9.65 67.56,8.13 v68.58,8.13
MOSI  (via drill 0.4)
  Top 0.254: U4.11 68.88,10.11 v68.58,10.41 | U5.12 46.48,20.93 v46.48,20.07
  Route2 0.406: JP5.3 72.64,3.05 72.64,5.59 71.37,6.86 71.37,7.62 v68.58,10.41 67.31,11.68 54.86,11.68 v46.48,20.07
N$1
  Top 0.254: LED1.A R1.1
N$2
  Top 0.254: Q3.4 17.14,31.62 17.27,31.75 R11.2
N$3
  Top 0.254: U5.4 38.66,22.16 R6.2
N$4
  Top 0.254: U5.5 39.42,21.79 39.37,21.74 39.24,21.61 R7.2
N$5
  Top 1.422: F1.P$2 J4.2
N$6
  Top 1.016: Q1.3 98.81,50.8 99.73,51.72 D2.C 99.66,54.7 98.3,55.63 F1.P$1
N$8
  Bottom 0.254: 99.31,12.57 arc180 97.03,14.1 arc180 94.74,12.57 97.03,10.16 99.31,12.57
N$10
  Top 0.254: R3.2 96.03,47.73 Q1.1
N$11
  Top 0.254: Q2.4 19.68,46.86 20.07,46.48 R9.2
PB4  (via drill 0.4)
  Top 0.254: U5.14 v50.42,22.61
  Route2 0.406: J8.5 98.3,20.57 66.8,20.57 63.75,23.62 51.44,23.62 v50.42,22.61
PD0-SCL  (via drill 0.4)
  Top 0.254: U5.25 57.08,23.5 65.41,23.5 v67.06,21.84
  Route2 0.406: J8.6 v67.06,21.84
PD1-SDA  (via drill 0.4)
  Top 0.254: U5.26 57.58,24.13 66.04,24.13 v67.06,23.11
  Route2 0.406: J8.7 98.3,23.11 v67.06,23.11
PD2-RX1  (via drill 0.4)
  Top 0.254: U5.27 58.2,24.64 66.8,24.64 v67.06,24.38
  Route2 0.406: J8.8 v67.06,24.38
PD3-TX1  (via drill 0.4)
  Top 0.254: U5.28 58.82,25.15 66.55,25.15 v67.06,25.65
  Route2 0.406: J8.9 98.3,25.65 v67.06,25.65
PD4  (via drill 0.4)
  Top 0.254: U5.29 59.32,25.78 65.91,25.78 v67.06,26.92
  Route2 0.406: J8.10 v67.06,26.92
PD5  (via drill 0.4)
  Top 0.254: U5.30 59.94,26.29 65.15,26.29 v67.06,28.19
  Route2 0.406: J8.11 98.3,28.19 v67.06,28.19
PD6  (via drill 0.4)
  Top 0.254: U5.31 60.57,26.8 64.39,26.8 v67.06,29.46
  Route2 0.406: J8.12 v67.06,29.46
PD7  (via drill 0.4)
  Top 0.254: U5.32 61.06,27.43 63.75,27.43 v67.06,30.73
  Route2 0.406: J8.13 98.3,30.73 v67.06,30.73
PE5  (via drill 0.4)
  Top 0.254: U5.19 52.07,21.72 v52.07,22.1
  Route2 0.406: J8.4 66.8,19.3 63.25,22.86 52.83,22.86 v52.07,22.1
SCLK  (via drill 0.4)
  Top 0.254: JP5.4 73.91,7.37 71.82,9.46 U4.12 67.88,9.46 v67.82,9.4 | U5.11 45.47,21.05 v45.47,20.57
  Route2 0.406: v67.82,9.4 66.55,10.67 54.61,10.67 45.47,19.81 v45.47,20.57
SDCD  (via drill 0.4)
  Top 0.254: v90.17,13.72 91.31,12.58 J2.CD2 | U5.17 51.82,19.2 v51.82,17.78
  Route2 0.406: v90.17,13.72 55.88,13.72 v51.82,17.78
SDCLK
  Top 0.254: U4.3 77.66,9.46 78.23,8.89 78.23,7.37 80.52,5.08 84.07,5.08 85.09,4.06 J2.5
  Top 0.305: J2.5
SDCS  (via drill 0.4)
  Top 0.254: U4.10 69.5,10.76 v67.56,12.7 | U5.10 47.16,23.88 v47.75,23.88
  Route2 0.406: v47.75,23.88 47.75,20.07 55.12,12.7 v67.56,12.7
SDCSH
  Top 0.254: U4.5 78.65,10.76 79.5,9.91 79.5,7.87 81.28,6.1 85.6,6.1 88.39,3.3 J2.2
SDDI
  Top 0.254: U4.4 78.19,10.11 78.99,9.31 78.99,7.62 81.03,5.59 85.34,5.59 87.29,3.64 J2.3
SDDO
  Top 0.254: U4.2 77.04,8.81 77.47,8.38 77.47,7.11 80.26,4.32 82.3,4.32 82.89,3.73 J2.7
UCAP
  Top 0.254: C9.2 43.69,23.11 43.69,23.8 U5.7
USB_DN
  Top 0.254: J3.D- 30.59,5.07 30.61,5.21 30.61,14.61 31.94,15.94 31.94,17.97 32.45,18.48 U2.3 34.99,18.48 37.03,20.52 R6.1
USB_DP
  Top 0.254: J3.D+ 31.24,14.22 33.28,16.26 U2.1 34.86,16.58 35.56,17.27 35.56,18.03 37.47,19.95 R7.1
VBUS
  Top 0.406: J3.VBUS 29.94,15.52 29.84,15.62 29.84,17.53 | U2.5 29.84,17.53 | 29.84,17.53 SJ1.1 31.65,20.03 C5.2 34.25,20.03 37.59,23.37 38.73,23.37 U5.3 43.05,27.69 43.69,27.69 45.97,25.4 45.97,24.95 U5.8
X-DIR  (via drill 0.4)
  Top 0.254: U5.49 49.02,39.47 v49.02,40.39
  Route2 0.406: v49.02,40.39 40.13,49.28 32.77,49.28 28.96,53.09 P1.DIR
X-MOT-1A
  Top 1.27: P1.1A JP11.3
X-MOT-1B
  Top 1.27: P1.1B JP11.4
X-MOT-2A
  Top 1.27: P1.2A JP11.2
X-MOT-2B
  Top 1.27: P1.2B JP11.1
X-MS1
  Top 0.406: SJ12.1 P1.MS1
X-MS2
  Top 0.406: SJ7.1 P1.MS2
X-MS3
  Top 0.406: SJ2.1 P1.MS3
X-RESETSLEEP
  Route2 0.406: P1.!RST P1.!SLP
X-STEP  (via drill 0.4)
  Top 0.254: U5.50 48.01,39.36 v48.01,39.88
  Route2 0.406: v48.01,39.88 39.36,48.51 30.99,48.51 26.42,53.09 P1.STEP
X-STOP
  Top 0.254: JP8.1 56.64,6.6 56.64,7.11 49.02,14.73 49.02,18.95 U5.16
XTAL1
  Top 0.254: U5.24 56.09,23.41 57.15,22.35 60.06,22.35 C13.2 61.87,20.55 X1.P$2
XTAL2
  Top 0.254: U5.23 56.64,21.67 56.64,18.93 C12.2 58.7,16.87 X1.P$1
Y-DIR  (via drill 0.4)
  Top 0.254: U5.46 54.1,38.73 v54.1,40.64
  Route2 0.406: v54.1,40.64 49.28,45.47 P2.DIR
Y-MOT-1A
  Top 1.27: P2.1A JP12.3
Y-MOT-1B
  Top 1.27: P2.1B JP12.4
Y-MOT-2A
  Top 1.27: P2.2A JP12.2
Y-MOT-2B
  Top 1.27: P2.2B JP12.1
Y-MS1
  Top 0.406: P2.MS1 SJ13.1
Y-MS2
  Top 0.406: P2.MS2 SJ8.1
Y-MS3
  Top 0.406: P2.MS3 SJ3.1
Y-RESETSLEEP
  Route2 0.406: P2.!RST P2.!SLP
Y-STEP  (via drill 0.4)
  Top 0.254: U5.47 53.34,39.1 v53.34,39.62
  Route2 0.406: v53.34,39.62 46.74,46.23 P2.STEP
Y-STOP
  Top 0.254: U5.15 48.26,19.32 48.26,14.48 53.34,9.4 53.34,7.87 51.82,6.35 JP9.1
Z-DIR  (via drill 0.4)
  Top 0.254: U5.42 v57.74,37.85
  Route2 0.406: P3.DIR 69.6,49.7 v57.74,37.85
Z-MOT-1A
  Top 1.27: P3.1A JP15.3
Z-MOT-1B
  Top 1.27: P3.1B JP15.4
Z-MOT-2A
  Top 1.27: P3.2A JP15.2
Z-MOT-2B
  Top 1.27: P3.2B JP15.1
Z-MS1
  Top 0.406: P3.MS1 SJ14.1
Z-MS2
  Top 0.406: P3.MS2 SJ9.1
Z-MS3
  Top 0.406: P3.MS3 SJ4.1
Z-RESETSLEEP
  Route2 0.406: P3.!RST P3.!SLP
Z-STEP  (via drill 0.4)
  Top 0.254: U5.44 55.88,38.25 v55.88,38.61
  Route2 0.406: v55.88,38.61 56.9,38.61 67.06,48.77 P3.STEP
Z-STOP  (via drill 0.4)
  Top 0.254: U5.1 39.88,26.77 v39.88,26.67 | Q5.3 41.15,14.73 v41.15,15.94
  Route2 0.406: v39.88,26.67 39.88,17.21 v41.15,15.94
Z-STOP-BIAS
  Top 0.254: JP7.1 45.21,4.83 45.21,11.83 Q5.1
Z-STOP-SUPPLY
  Top 0.406: JP6.2 JP7.2

## Text on the board
Bottom: Nur
_tsilk: 2B 2A 1A 1B | +12V | GND | 2B 2A 1A 1B | 2B 2A 1A 1B | 2B 2A 1A 1B | +12V | E1-THRM | GND | B-THRM | +12V | TeensyluV1 | 14 | Rev. 1.2 | https://github.com/StephS/Teensylu | Licensed CC-BY-SA | +12V | 1 | +12V | +5V | +12V | +5V | +12V | +12V | Z-STOP | Y-STOP | X-STOP | E-STOP | GND | GND